# EAGLE board Puzzle Screw Terminal v1.0 (EAGLE 6.2)
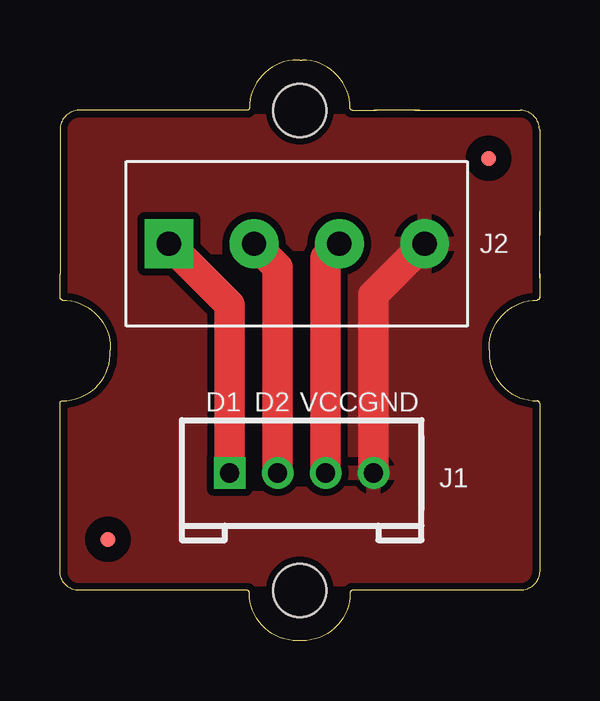
[diagram p0: board, top side]
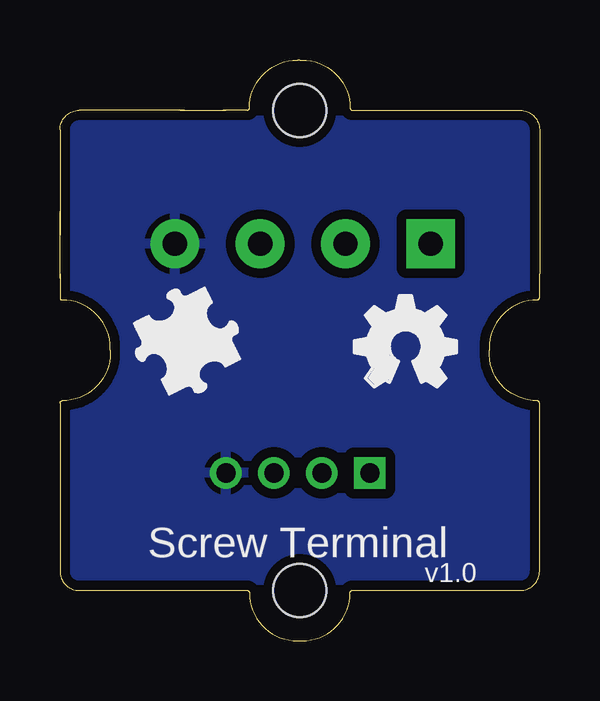
[diagram p1: board, bottom side, seen from below]

Size 20 x 24.2 mm. Coordinates in mm from the lower left corner, seen from the top.
Copper layers (1*16): Top 0.035mm / dielectric 1.5mm / Bottom 0.035mm
Design rules: minimum track width 6mil, minimum drill 12mil, track to track 6mil, track to pad 6mil, pad to pad 6mil, via to via 6mil, smd to smd 0mil, copper to edge 10mil, drill to drill 10mil, minimum pad ring 10mil, minimum via ring 6mil, stop-mask expansion 2mil, vias tented up to drill 100mil, thermal gap 10mil

## Footprints (pad centres in the part's own frame; a part is rotated, then mirrored left to right if it is on the bottom)
4P-LEADED-2.0 = drill 0.8 pad 1.27 square: 1 -3,0 | drill 0.8 pad 1.27: 2 -1,0; 3 1,0; 4 3,0
4P-3.5 = drill 1.016 pad 2.032 square: 1 0,5.334 | drill 1.016 pad 2.032: 2 0,1.778; 3 0,-1.778; 4 0,-5.334
ROUND-MARK-0.635 = smd 0.635 x 0.635: P$1 0,0
1U-DIM-W/-DRILL = hole 2.2: 0,-10; 0,10

## Placement (x,y rotation side)
E$1  [BRICK-LOGO-MIL-0.5]  17.24,9.94 0 bottom
J1  TWIG  [4P-LEADED-2.0]  10.08,6.99 0 top
J2  [4P-3.5]  9.87,16.55 90 top
LOGO1  LOGO-OSHW-FILLX0150-NT  [OSHW_FILLX150_NOTEXT]  7.71,10.58 0 bottom
MARK1  [ROUND-MARK-0.635]  2,4.23 0 top
MARK2  [ROUND-MARK-0.635]  17.87,20.1 0 top
TWIG2  U1N  [1U-DIM-W/-DRILL]  10,12.1 180 top

## Library data of the parts
E$1 = duinofun-logo
J1 J2 = Connector
LOGO1 = Logo
MARK1 MARK2 = Discrete
TWIG2 = Module

## Nets
D1: J1.1 J2.1
D2: J1.2 J2.2
GND: J1.4 J2.4
VCC: J1.3 J2.3

## Tracks (layer width: path | path; a pad name or v marks a point on that pad's centre or on a via)
D1
  Top 1.27: J1.1 7.08,14.01 J2.1
D2
  Top 1.27: J1.2 9.08,15.56 J2.2
GND
  Top 1.27: J1.4 13.08,14.41 J2.4
  pour Top (isolate 0.305): 22.07,-1.11 -2.45,-1.11 -2.45,25.18 22.07,25.18
  pour Bottom (isolate 0.406): 21.94,-0.85 -2.19,-0.85 -2.19,25.18 21.94,25.18
VCC
  Top 1.27: J1.3 11.08,15.97 J2.3

## Text on the board
tPlace: D1 | D2 | VCC | GND
bPlace: Screw Terminal | v1.0